# Altium PCB pcb.PcbDoc (part 3 of 3)
Units mil, origin at the board's own origin, x right, y up, seen from the top; angles counter-clockwise.
Board outline 2027.84 x 963.26 mil, 2 copper layers (Top Layer, Bottom Layer), stack 27.8 mil thick; 72 components, 62 nets, 350 pads, 49 vias.
Unrouted connection lines stored in the file: 14.
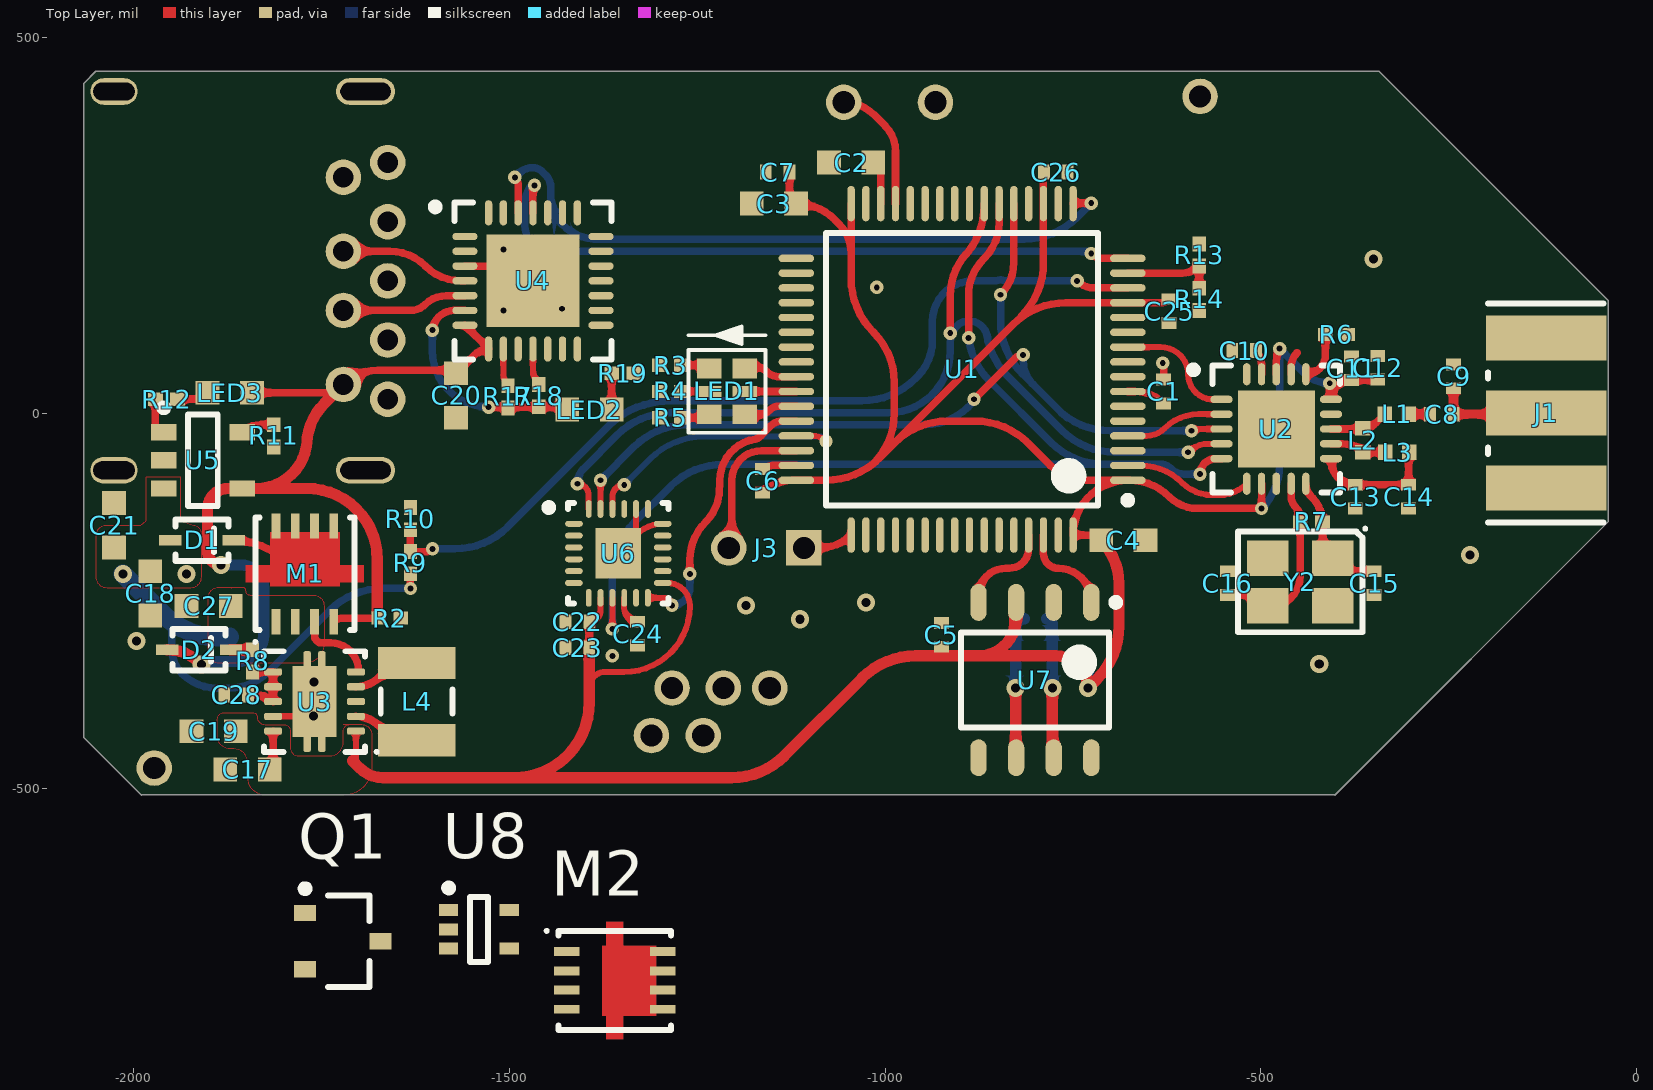
[diagram p0: Top Layer view]

## Via types
v1: diameter 17.72, hole 7.87, Top Layer to Bottom Layer, 33 vias
v2: diameter 24, hole 12, Top Layer to Bottom Layer, 16 vias

## Nets (pads, with @x,y where several pads share a name; then routed paths per layer and width w, separated by ;. In a path a pad name is that pad's centre, name@x,y a point inside that pad or via, vN(x,y) a via of type N, cw(c..) or ccw(c..) an arc to the next point about the centre after c; other vN are vias at no path point) (continued)
SPI3_MOSI: (continued)
  Bottom Layer w10: v1(-1409.49,-94.09) cw(c-1381.03,-94.09) -1401.16,-73.96 -1356.24,-29.04 cw(c-1285.52,-99.75) -1285.52,0.25 -995.81,0.25 ccw(c-995.81,82.68) -913.39,82.68 -913.39,94.11 cw(c-882.57,94.11) -904.36,115.89 -903.67,116.59 cw(c-889.11,102.03) -889.11,122.62 cw(c-889.11,97.07) -865.22,106.16 ; -863.55,97.07 ccw(c-889.11,97.07) -865.22,106.16 ; v1(-596.79,-52.2) -694.27,-52.2 cw(c-694.27,47.8) -764.98,-22.91 -836.85,48.97 cw(c-766.14,119.68) -865.22,106.16
SPI3_SCK: U1.21 U2.3 U6.23 | length 1236.3
  Top Layer w8: U6.23 v1(-1378.61,-89.47) ; v1@-591.01,-25.99 cw(c-579.56,-37.44) -579.56,-21.25 U2.3
  Top Layer w10: v1(-881.74,18.32) -826.99,73.07 cw(c-816.42,62.51) v1(-816.42,77.45) ; v1(-846.46,157.33) ccw(c-889.24,200.11) -828.73,200.11 U1.21
  Bottom Layer w10: v1(-1378.61,-89.47) -1334.18,-45.04 cw(c-1263.46,-115.75) -1263.46,-15.75 -946.79,-15.75 ccw(c-946.79,64.9) -889.76,7.87 -883.45,14.19 ccw(c-887.59,18.32) v1(-881.74,18.32) ; v1(-846.46,157.33) -846.46,122.62 ccw(c-746.46,122.62) -817.17,51.91 -803.27,38.01 ; v1(-816.42,77.45) -816.42,69.77 ccw(c-771.51,69.77) -803.27,38.01 ; v1(-592.39,-23.55) -700.77,-23.55 cw(c-700.77,76.45) -765.39,0.13 -803.27,38.01
SWCLK: J3.2 U1.49 | length 67.4
  Top Layer w10: J3.2 -1086.71,-179.47 ccw(c-1086.71,-120.87) U1.49
SWDIO: J3.1 U1.46 | length 199.3
  Top Layer w10: J3.1 ccw(c-1218.51,-169.07) -1203.8,-169.07 -1203.8,-89.47 cw(c-1164.43,-89.47) -1164.43,-50.1 U1.46
SWITCH_IN: pad.4 U1.29 | length 172.7
  Top Layer w10: pad.4 cw(c-1055.12,356.36) -1014.8,396.69 -1000,381.89 cw(c-1033.28,348.61) -986.21,348.61 U1.29
SWITCH_RISING_IN: U8.2
UART_RX: J2.1 U1.17 U4.26 | length 918
  Top Layer w10: v1(-1492.61,313.49) cw(c-1503.16,302.93) -1488.23,302.93 U4.26 ; U1.17 cw(c-748.44,277.08) -748.44,279.28 v1(-725.73,279.28)
  Bottom Layer w10: v1(-1492.61,313.49) -1486.95,319.14 cw(c-1469.12,301.32) -1469.12,326.53 cw(c-1469.12,308.28) -1456.22,321.18 -1451.35,316.31 cw(c-1466.82,300.84) -1444.94,300.84 -1444.94,287.07 ccw(c-1394.04,287.07) J2.1 ccw(c-1381.38,299.73) -1387.76,231.22 ccw(c-1386.81,241.18) -1386.81,231.18 -1114.64,231.18 -815.26,231.18 ccw(c-815.26,331.18) -744.55,260.46 v1(-725.73,279.28)
UART_TX: J2.2 U1.16 U4.25 | length 918.9
  Top Layer w10: U4.25 -1468.55,297.85 cw(c-1461.31,297.85) v1(-1466.43,302.97) ; v1(-725.73,212.25) ccw(c-710.17,227.81) -710.17,205.8 U1.16
  Bottom Layer w10: v1@-1468.9,304.25 ccw(c-1443.92,279.28) -1479.24,279.28 J2.2 -1479.24,249.48 ccw(c-1444.94,249.48) -1444.94,215.18 -732.8,215.18 cw(c-732.8,205.18) v1(-725.73,212.25)
USB-UART-3V3: LED2.A R17.1 R18.1 U4.6 | length 313.4
  Top Layer w10: v1(-1602.36,110.24) -1602.36,107.96 -1602.15,107.96 cw(c-1573.68,107.96) -1573.68,136.44 U4.6 ; v1(-1527.56,7.87) -1426.15,7.87 cw(c-1426.15,4.62) LED2.A
  Bottom Layer w10: v1(-1602.36,110.24) -1602.36,82.68 ccw(c-1527.56,82.68) v1(-1527.56,7.87)
V_BATT_LP: C21.2 J7.2 M2.3 R9.1 U5.3 U8.5 | length 636.7
  Top Layer w10: v1(-1631.5,-233.44) R9.1
  Bottom Layer w10: -1959.53,-268.57 cw(c-1985.38,-294.42) -1948.82,-294.42 -1948.82,-315.15 ccw(c-1904.55,-315.15) -1935.85,-346.46 ccw(c-1888.33,-298.93) -1888.33,-366.14 -1874.02,-366.14 ccw(c-1874.02,-290.1) -1820.25,-343.87 -1739.1,-262.73 cw(c-1668.39,-333.44) -1668.39,-233.44 v1(-1631.5,-233.44) ccw(c-1634.29,-236.22) v1@-1634.29,-232.28
  Bottom Layer w25: v2(-2014.18,-213.91) -1959.53,-268.57 ccw(c-1888.82,-197.86) -1888.82,-297.86 J7.2
V_HV_BATT: pad.1 R13.1
VUSB: C20.2 D2.1 J4.1 LED3.A M1.2 R2.1 U4.7 U4.8 U5.4 | length 1384.8
  Top Layer w10: U5.4 -1835.9,-100.3 ; LED3.A -1747.45,26.97 ccw(c-1747.45,64.67) J4.1 cw(c-1675.31,-7.47) -1675.31,56.85 -1580.41,56.85 cw(c-1580.41,43.35) C20.2 -1546.22,77.54 cw(c-1527.6,58.93) U4.8 U4.7 ; M1.2 cw(c-1721.71,-289.57) -1721.71,-272.77 R2.1
  Top Layer w15: D2.1 cw(c-1955.13,-377.67) v2@-1910.78,-333.32 ; v2(-1883.4,-202.11) cw(c-1883.4,-184.08) -1901.44,-184.08 -1901.44,-127.69 cw(c-1874.04,-127.69) -1874.04,-100.3 U5.4 ; J4.1 -1745.75,13.05 ccw(c-1687.6,-45.1) -1769,-33.4 cw(c-1835.9,-33.4) -1769.83,-43.89 cw(c-1835.9,-33.4) -1835.9,-100.3 -1769.94,-100.3 cw(c-1769.94,-194.62) -1675.62,-194.62 -1675.62,-268.46 ccw(c-1669.53,-268.46) R2.1
  Bottom Layer w15: v2(-1909.45,-334.65) cw(c-1905.51,-334.65) -1905.51,-330.71 -1862.2,-330.71 ccw(c-1862.2,-295.28) -1826.77,-295.28 -1826.77,-232.28 ccw(c-1856.95,-232.28) -1856.95,-202.11 v2(-1883.4,-202.11)
pads on no net: J4.5 J4.6 J4.7 J4.8 J4.9 U1.3 U1.5 U1.6 U1.8 U1.9 U1.11 U1.20 U1.24 U1.25 U1.26 U1.33 U1.34 U1.35 U1.36 U1.37 U1.38 U1.39 U1.40 U1.50 U1.51 U1.52 U1.53 U1.54 U1.55 U1.56 U1.57 U1.58 U1.59 U2.21 U4.1 U4.2 U4.10 U4.12 U4.13 U4.14 U4.15 U4.16 U4.17 U4.18 U4.19 U4.20 U4.21 U4.22 U4.23 U4.24 U4.27 U4.28 U6.1 U6.2 U6.3 U6.4 U6.5 U6.6 U6.7 U6.11 U6.14 U6.15 U6.16 U6.17 U6.19 U6.21 U7.2 U7.5 U7.8

## Polygon pours and split planes (outlines as drawn)
NetC27_2 on Top Layer "NONET_L01_P014" (solid, remove dead copper, shelved, pour order 14): -1869.08,-232.28 -1886.11,-232.28 ccw(c-1886.11,-247.61) -1901.44,-247.61 -1901.44,-316.66 ccw(c-1885.63,-316.66) -1885.63,-332.47 -1772.12,-332.47 ccw(c-1772.12,-306.1) -1745.75,-306.1 -1745.75,-257 ccw(c-1759.91,-257) -1759.91,-242.85 -1843.76,-242.85 cw(c-1843.76,-236.22) -1850.39,-236.22 ccw(c-1854.33,-236.22) -1854.33,-232.28 -1870.08,-232.28
V_BATT_LP on Top Layer "NONET_L01_P019" (solid, remove dead copper, shelved, pour order 19): -2050.11,-217.61 ccw(c-2035.43,-217.61) -2035.43,-232.28 -1923.65,-232.28 ccw(c-1923.65,-218.08) -1909.45,-218.08 -1909.45,-160.7 ccw(c-1920.02,-160.7) -1920.02,-150.13 -1936.87,-143.76 -1936.87,-85.58 -1983.77,-85.58 -1983.77,-143.76 -1991.25,-150.13 -2037.12,-150.13 ccw(c-2037.12,-163.12) -2050.11,-163.12
3V3 on Top Layer "NONET_L01_P023" (solid, remove dead copper, shelved, pour order 23): -1720.79,-414.25 -1696.55,-414.25 cw(c-1696.55,-427.94) -1682.87,-427.94 -1682.87,-470.61 cw(c-1720.79,-470.61) -1720.79,-508.54 -1824.39,-508.54 cw(c-1824.39,-485.16) -1847.76,-485.16 -1847.76,-465.5 ccw(c-1866.49,-465.5) -1866.49,-446.76 -1871.66,-446.76 cw(c-1871.66,-430.15) -1888.27,-430.15 -1888.27,-407.67 cw(c-1879.26,-407.67) -1879.26,-398.65 -1840.54,-398.65 cw(c-1840.54,-403.53) -1835.66,-403.53 -1835.66,-403.66 ccw(c-1824.92,-403.66) -1824.92,-414.4 -1800.23,-414.4 cw(c-1800.23,-423.22) -1791.42,-423.22 -1791.42,-445.59 ccw(c-1781.13,-445.59) -1781.13,-455.87 -1738.68,-455.87 ccw(c-1738.68,-437.98) -1720.79,-437.98 -1720.79,-422.56 cw(c-1712.63,-422.56) -1712.63,-414.4
GND on Top Layer "NONET_L01_P026" (solid, remove dead copper, shelved, pour order 26): -4224.75,1245.9 -4224.75,-945.37 1061.81,-945.37 1061.81,1245.89
GND on Bottom Layer "NONET_L02_P004" (solid, remove dead copper, shelved, pour order 4): -2095.99,518.18 -2095.99,-583.43 -1985.99,-693.43 66.93,-693.43 66.93,566.93 -2047.24,566.93

## Silkscreen, mask and mechanical layers (free items; w line width, h text height)
Top Overlay:
  drawing of 17 lines, arcs and shapes, not listed
  text "3.3" at -2694.01,435.71 h30
  text "SDA" at -2339.01,435.22 h30
  text "GND" at -2844.01,434.22 h30
  text "SCL" at -2468.26,384.21 h30
  text "chg" at -2534.62,195.49 h35
  text "batt" at -2300.94,-268.23 h35 r90
  text "robot-cortex / v1-r1" at -2827.91,-356.07 h35
Bottom Overlay:
  text "usb" at -2324.78,139.91 h35 r270
  text "VBAT" at -2446.81,5.33 h35
  text "GND" at -2324.78,-45.1 h35 r270
  text "LP/IN" at -2503.23,-134.83 h35
  text "HP" at -2393.23,-134.83 h35
  text "GND" at -2268.23,-134.83 h35
  text "TX" at -3020.3,-199.83 h35
  text "RX" at -2783.23,-199.83 h35
Mechanical 1:
  the board outline again, w1